# Altium PCB PCB.PcbDoc
Units mil, origin at the board's own origin, x right, y up, seen from the top; angles counter-clockwise.
Board outline 11290 x 5470 mil, 2 copper layers (Top Layer, Bottom Layer), stack 61.756 mil thick; 71 components, 74 nets, 190 pads, 9 vias.
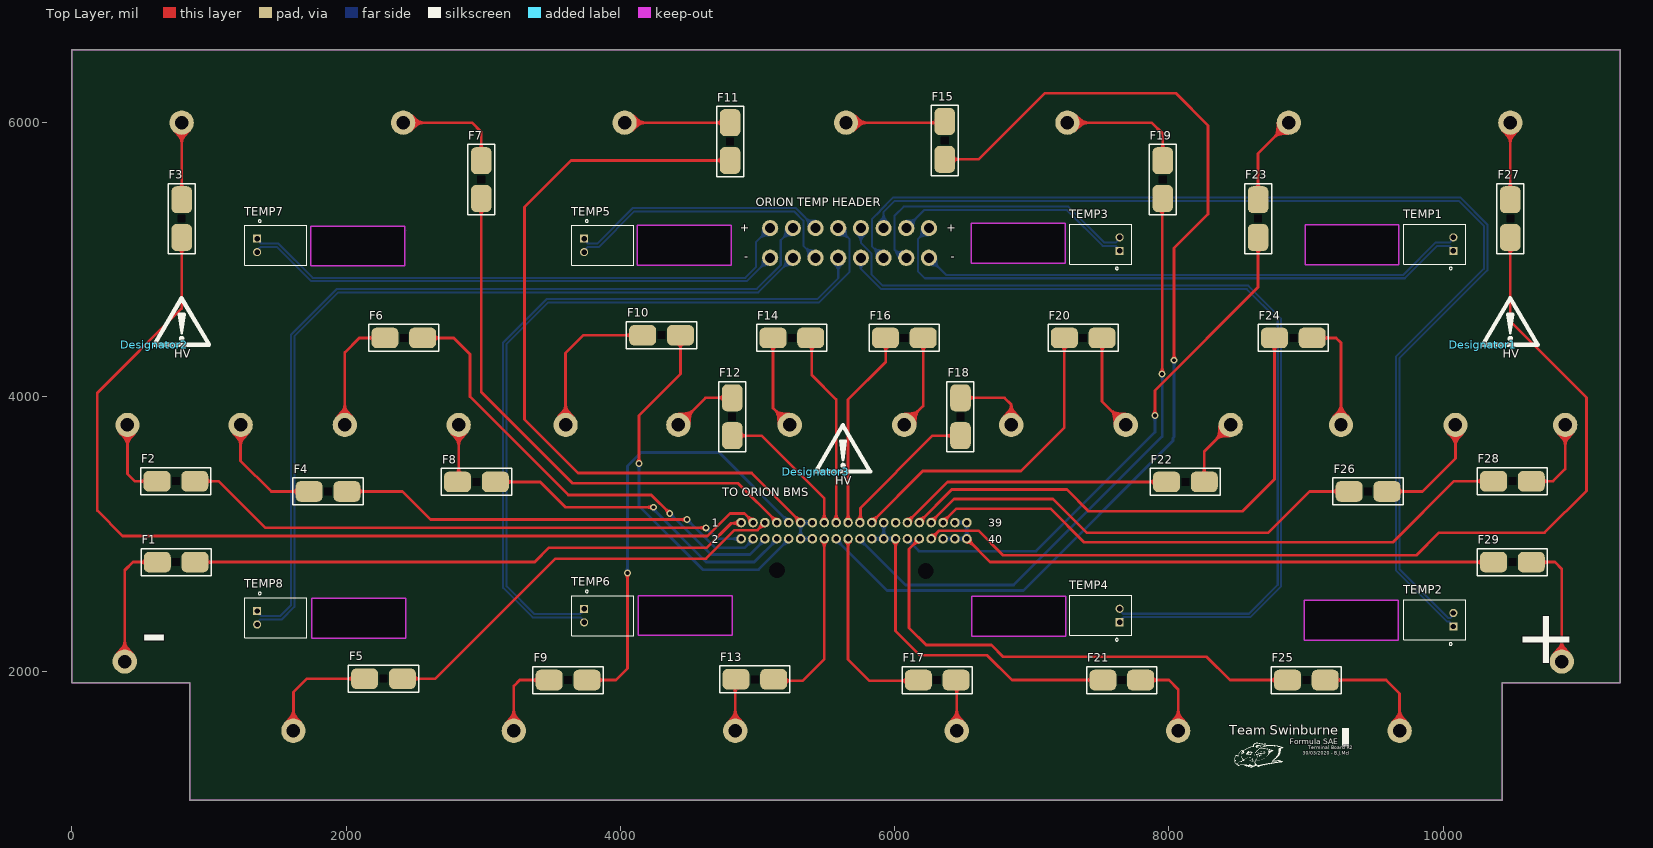
[diagram p0: Top Layer view]
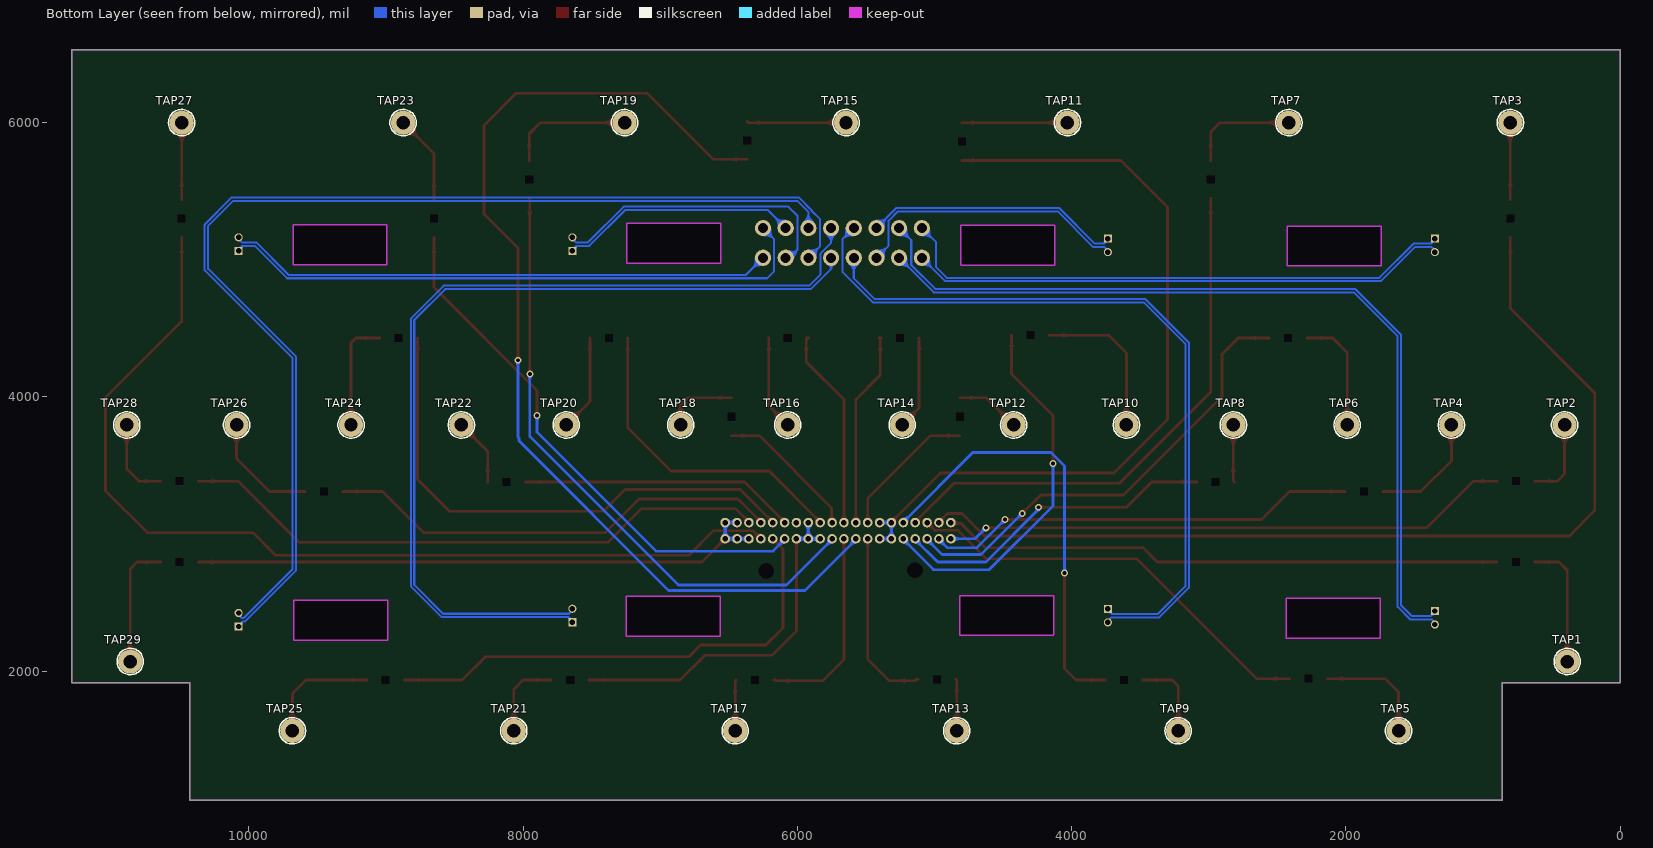
[diagram p1: Bottom Layer view, seen from below]
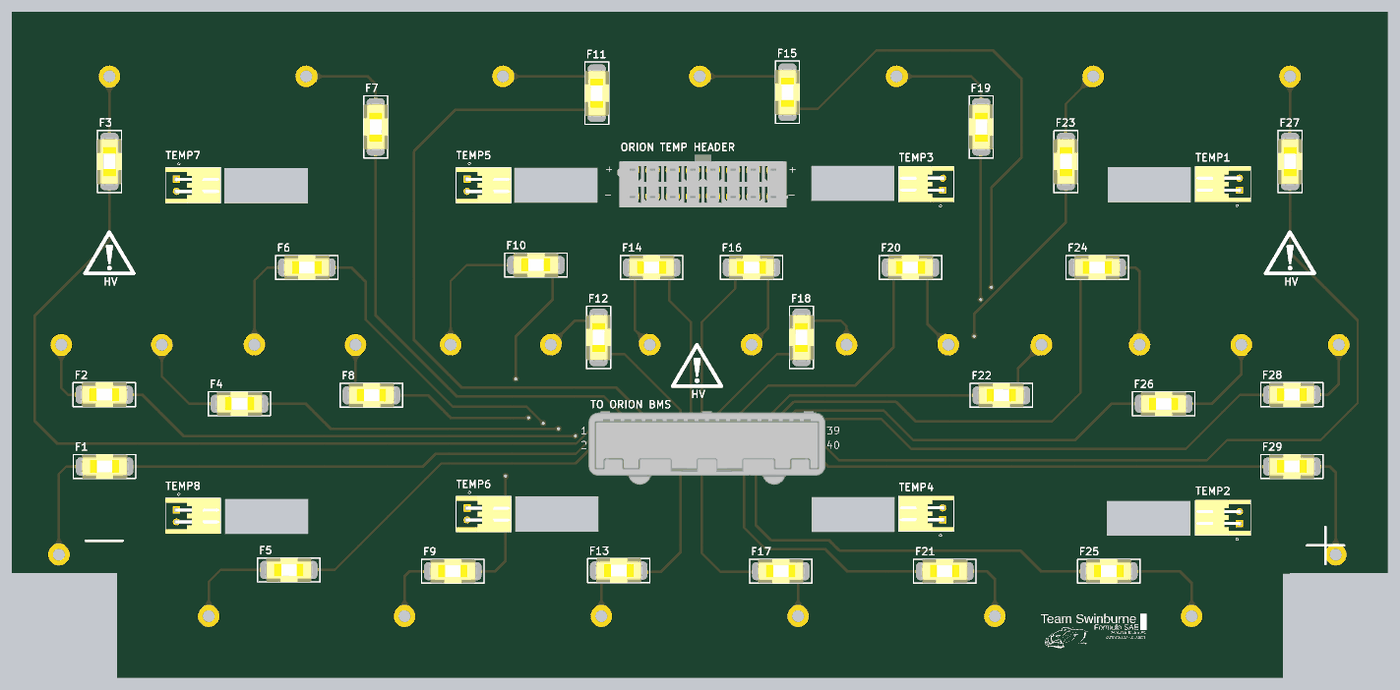
[diagram p2: 3D render of the assembled board from above, using the file's embedded part models]

## Layer stack, top to bottom
Top Solder: solder mask 1, SM-001, Dk 4
Top Layer: signal copper 1.378
Dielectric 1: core 59, Core-043, Dk 4.3
Bottom Layer: signal copper 1.378
Bottom Solder: solder mask 1, SM-001, Dk 4

## Board outline
0,1915 860,1915 860,1060 10430,1060 10430,1915 11290,1915 11290,6530 0,6530
cut-out: 8987.5,2515 9672.5,2515 9672.5,2225 8987.5,2225
cut-out: 6562.5,2545 7247.5,2545 7247.5,2255 6562.5,2255
cut-out: 8992.5,5255 9677.5,5255 9677.5,4965 8992.5,4965
cut-out: 6557.5,5265 7242.5,5265 7242.5,4975 6557.5,4975
cut-out: 1747.5,2530 2432.5,2530 2432.5,2240 1747.5,2240
cut-out: 4130,2550 4815,2550 4815,2260 4130,2260
cut-out: 4122.5,5250 4807.5,5250 4807.5,4960 4122.5,4960
cut-out: 2440,5215
cut-out: 1742.5,5245 2427.5,5245 2427.5,4955 1742.5,4955

## Design rules (kind name [scope] priority, off if disabled: settings)
Clearance [All] p1: gap=10 ignorepadtopadclearanceinfootprint=FALSE except(0: Arc-Hole Track-Hole SMDPad-Hole THPad-Hole Via-Hole Fill-Hole Poly-Hole Region-Hole Text-Hole)
PolygonConnect [All] p1: connectstyle=Relief reliefconductorwidth=10 reliefentries=4 polygonreliefangle="90 Angle" airgapwidth=10
RoutingVias [All] p1: holewidth=28 width=50 viastyle="Through Hole" minholewidth=28 minwidth=50 maxholewidth=28 maxwidth=50
SolderMaskExpansion [All] p1: expansion=4 istentingtop=FALSE
Width [All] p1: maxlimit=50 minlimit=10 preferedwidth=40
30 further rules are at their usual default settings.

## Components (designator, comment, footprint, x,y, rotation, side; value= is the part's Value field where it differs from the comment)
Designator1 "Comment" "~HV Silk" 10290,4379.92 r0 top
Designator2 "Comment" "~HV Silk" 600,4379.92 r0 top
Designator3 "Comment" "~HV Silk" 5423.23,3454.72 r0 top
F1 "0154.750DR" "Omni BLOK 0154" 760,2795 r180 top
F2 "0154.750DR" "Omni BLOK 0154" 757.8,3385 r180 top
F3 "0154.750DR" "Omni BLOK 0154" 800,5300 r90 top
F4 "0154.750DR" "Omni BLOK 0154" 1867.2,3310 r180 top
F5 "0154.750DR" "Omni BLOK 0154" 2272.2,1945 r180 top
F6 "0154.750DR" "Omni BLOK 0154" 2420,4430 r180 top
F7 "0154.750DR" "Omni BLOK 0154" 2985,5585 r90 top
F8 "0154.750DR" "Omni BLOK 0154" 2950,3380 r180 top
F9 "0154.750DR" "Omni BLOK 0154" 3618.2,1935 r180 top
F10 "0154.750DR" "Omni BLOK 0154" 4300,4450 r180 top
F11 "0154.750DR" "Omni BLOK 0154" 4800,5862.2 r90 top
F12 "0154.750DR" "Omni BLOK 0154" 4815,3855 r90 top
F13 "0154.750DR" "Omni BLOK 0154" 4980,1940 r180 top
F14 "0154.750DR" "Omni BLOK 0154" 5250,4430 r180 top
F15 "0154.750DR" "Omni BLOK 0154" 6365,5870 r90 top
F16 "0154.750DR" "Omni BLOK 0154" 6070,4430 r0 top
F17 "0154.750DR" "Omni BLOK 0154" 6310.2,1935 r0 top
F18 "0154.750DR" "Omni BLOK 0154" 6480,3855 r90 top
F19 "0154.750DR" "Omni BLOK 0154" 7955,5585 r90 top
F20 "0154.750DR" "Omni BLOK 0154" 7375,4430 r0 top
F21 "0154.750DR" "Omni BLOK 0154" 7656.2,1935 r0 top
F22 "0154.750DR" "Omni BLOK 0154" 8120,3380 r0 top
F23 "0154.750DR" "Omni BLOK 0154" 8650,5300 r90 top
F24 "0154.750DR" "Omni BLOK 0154" 8907.2,4430 r0 top
F25 "0154.750DR" "Omni BLOK 0154" 9002.2,1935 r0 top
F26 "0154.750DR" "Omni BLOK 0154" 9452.2,3310 r0 top
F27 "0154.750DR" "Omni BLOK 0154" 10490,5300 r90 top
F28 "0154.750DR" "Omni BLOK 0154" 10505,3385 r0 top
F29 "0154.750DR" "Omni BLOK 0154" 10505,2795 r0 top
"ORION TEMP HEADER" "39293166" 39293166 5675,5105 r0 top
TAP1 "0850-0-15-20-83-14-11-0" 0850-0-15-20-83-14-11-0 385,2070 r180 bottom
TAP2 "0850-0-15-20-83-14-11-0" 0850-0-15-20-83-14-11-0 405,3795 r180 bottom
TAP3 "0850-0-15-20-83-14-11-0" 0850-0-15-20-83-14-11-0 800,6000 r180 bottom
TAP4 "0850-0-15-20-83-14-11-0" 0850-0-15-20-83-14-11-0 1230,3795 r180 bottom
TAP5 "0850-0-15-20-83-14-11-0" 0850-0-15-20-83-14-11-0 1615,1565 r180 bottom
TAP6 "0850-0-15-20-83-14-11-0" 0850-0-15-20-83-14-11-0 1990,3795 r180 bottom
TAP7 "0850-0-15-20-83-14-11-0" 0850-0-15-20-83-14-11-0 2415,6000 r180 bottom
TAP8 "0850-0-15-20-83-14-11-0" 0850-0-15-20-83-14-11-0 2820,3795 r180 bottom
TAP9 "0850-0-15-20-83-14-11-0" 0850-0-15-20-83-14-11-0 3222.5,1565 r180 bottom
TAP10 "0850-0-15-20-83-14-11-0" 0850-0-15-20-83-14-11-0 3600,3795 r180 bottom
TAP11 "0850-0-15-20-83-14-11-0" 0850-0-15-20-83-14-11-0 4030,6000 r180 bottom
TAP12 "0850-0-15-20-83-14-11-0" 0850-0-15-20-83-14-11-0 4422.31,3795 r180 bottom
TAP13 "0850-0-15-20-83-14-11-0" 0850-0-15-20-83-14-11-0 4837.5,1565 r180 bottom
TAP14 "0850-0-15-20-83-14-11-0" 0850-0-15-20-83-14-11-0 5235,3795 r180 bottom
TAP15 "0850-0-15-20-83-14-11-0" 0850-0-15-20-83-14-11-0 5645,6000 r180 bottom
TAP16 "0850-0-15-20-83-14-11-0" 0850-0-15-20-83-14-11-0 6070,3795 r180 bottom
TAP17 "0850-0-15-20-83-14-11-0" 0850-0-15-20-83-14-11-0 6452.5,1565 r180 bottom
TAP18 "0850-0-15-20-83-14-11-0" 0850-0-15-20-83-14-11-0 6850,3795 r180 bottom
TAP19 "0850-0-15-20-83-14-11-0" 0850-0-15-20-83-14-11-0 7260,6000 r180 bottom
TAP20 "0850-0-15-20-83-14-11-0" 0850-0-15-20-83-14-11-0 7685,3795 r180 bottom
TAP21 "0850-0-15-20-83-14-11-0" 0850-0-15-20-83-14-11-0 8067.5,1565 r180 bottom
TAP22 "0850-0-15-20-83-14-11-0" 0850-0-15-20-83-14-11-0 8450,3795 r180 bottom
TAP23 "0850-0-15-20-83-14-11-0" 0850-0-15-20-83-14-11-0 8875,6000 r180 bottom
TAP24 "0850-0-15-20-83-14-11-0" 0850-0-15-20-83-14-11-0 9255,3795 r180 bottom
TAP25 "0850-0-15-20-83-14-11-0" 0850-0-15-20-83-14-11-0 9682.5,1565 r180 bottom
TAP26 "0850-0-15-20-83-14-11-0" 0850-0-15-20-83-14-11-0 10090,3795 r180 bottom
TAP27 "0850-0-15-20-83-14-11-0" 0850-0-15-20-83-14-11-0 10490,6000 r180 bottom
TAP28 "0850-0-15-20-83-14-11-0" 0850-0-15-20-83-14-11-0 10890,3795 r180 bottom
TAP29 "0850-0-15-20-83-14-11-0" 0850-0-15-20-83-14-11-0 10865,2070 r180 bottom
TEMP1 "S2B-XH-A(LF)(SN)" S2B-XH-A(LF)(SN) 10080,5114.21 r90 top
TEMP2 "S2B-XH-A(LF)(SN)" S2B-XH-A(LF)(SN) 10080,2374.78 r90 top
TEMP3 "S2B-XH-A(LF)(SN)" S2B-XH-A(LF)(SN) 7645,5114.21 r90 top
TEMP4 "S2B-XH-A(LF)(SN)" S2B-XH-A(LF)(SN) 7645,2405.79 r90 top
TEMP5 "S2B-XH-A(LF)(SN)" S2B-XH-A(LF)(SN) 3730,5105 r270 top
TEMP6 "S2B-XH-A(LF)(SN)" S2B-XH-A(LF)(SN) 3730,2404.21 r270 top
TEMP7 "S2B-XH-A(LF)(SN)" S2B-XH-A(LF)(SN) 1345,5105 r270 top
TEMP8 "S2B-XH-A(LF)(SN)" S2B-XH-A(LF)(SN) 1345,2389.21 r270 top
"TO ORION BMS" "1376113-6" 1376113-6 5746.61,2965 r0 top

## Footprints (in the part's own frame and the unit in brackets; to place one, negate y for a bottom-side part, rotate by r counter-clockwise, add the part's x,y. Pads: shape width x height; smd on the part's side, far side on the other; paste and mask are expansions set on the pad)
0850-0-15-20-83-14-11-0 [mm]
  round 4.5 hole 2.5 mask+0.102: 1(0,0)
  silkscreen extent -2.44,-2.44 2.44,2.44, body extent -1.94,-1.94 1.94,1.94, height 5.61
1376113-6 [mil]
  round 0 hole 114.49 unplated: 0(-605,-230) 0(480,-235)
  round 70 hole 40: 1(-866.14,118.11) 2(-866.14,0) 3(-779.53,118.11) 4(-779.53,0) 5(-692.91,118.11) 6(-692.91,0) 7(-606.3,118.11) 8(-606.3,0) 9(-519.69,118.11) 10(-519.69,0) 11(-433.07,118.11) 12(-433.07,0) 13(-346.46,118.11) 14(-346.46,0) 15(-259.84,118.11) 16(-259.84,0) 17(-173.23,118.11) 18(-173.23,0) 19(-86.61,118.11) 20(-86.61,0) 21(0,118.11) 22(0,0) 23(86.61,118.11) 24(86.61,0) 25(173.23,118.11) 26(173.23,0) 27(259.84,118.11) 28(259.84,0) 29(346.46,118.11) 30(346.46,0) 31(433.07,118.11) 32(433.07,0) 33(519.69,118.11) 34(519.69,0) 35(606.3,118.11) 36(606.3,0) 37(692.91,118.11) 38(692.91,0) 39(779.53,118.11) 40(779.53,0)
  body extent -1015,-321 930,281, height 940
39293166 [mm]
  round 3 hole 1.85: 1(14.6,-2.3) 2(14.6,3.2) 3(10.4,-2.3) 4(10.4,3.2) 5(6.2,-2.3) 6(6.2,3.2) 7(2,-2.3) 8(2,3.2) 9(-2.2,-2.3) 10(-2.2,3.2) 11(-6.4,-2.3) 12(-6.4,3.2) 13(-10.6,-2.3) 14(-10.6,3.2) 15(-14.8,-2.3) 16(-14.8,3.2)
  body extent -17.9,-4.6 17.7,6.4, height 12.8
"Omni BLOK 0154" [mm]
  rrect50% 5x3.81 smd: 1(3.5,0) 2(-3.5,0)
  rect 0x0 hole 1.4 square unplated: 3(0,0)
  silkscreen extent -6.5,-2.5 6.5,2.5, body extent -4.93,-2.52 4.9,2.51, height 3.81
S2B-XH-A(LF)(SN) [mm]
  rect 1.508x1.508 hole 1: 1(-1.25,0.127)
  round 1.508 hole 1: 2(1.25,0.127)
  silkscreen extent -4.75,-2.17 3.7,9.33, body extent -3.68,-2.19 3.72,9.31, height 6.15
"~HV Silk" [mil] "HV Symbol Silkscreen overlay"
  silkscreen extent 0,0 400,339

## Part data
F1 F2 F3 F4 F5 F6 F7 F8 F9 F10 F11 F12 F13 F14 F15 F16 F17 F18 F19 F20 F21 F22 F23 F24 F25 F26 F27 F28 F29: "FUSE BOARD MNT 750MA 125VAC/VDC", Digikey Part Number=F1221CT-ND, Manufacturer="LittelFuse Inc", Digikey Link=https://www.digikey.com/product-detail/en/littelfuse-inc/0154.750DR/F1221CT-ND/183370, Part Number=0154.750DR
"ORION TEMP HEADER": Digikey Part Number=WM3850-ND, Angle=0, Contact=Tin, Flange=No, Part Number=39293166, Pitch=4.2mm, Positions=16, Row Spacing=5.5mm
TAP1 TAP2 TAP3 TAP4 TAP5 TAP6 TAP7 TAP8 TAP9 TAP10 TAP11 TAP12 TAP13 TAP14 TAP15 TAP16 TAP17 TAP18 TAP19 TAP20 TAP21 TAP22 TAP23 TAP24 TAP25 TAP26 TAP27 TAP28 TAP29: Digikey Part Number=ED90436-ND, Angle=90, Contact=Gold, Digikey Link=https://www.digikey.com.au/products/en?keywords=0850-0-15-20-83-14-11-0, Flange=NA, Part Number=0850-0-15-20-83-14-11-0, Pitch=NA, Positions=1, Row Spacing=NA
"TO ORION BMS": Digikey Part Number=1376113-6-ND, Angle=180, Contact=Gold, Digikey Link=https://www.digikey.com.au/products/en?keywords=1376113-6, Flange=na, Part Number=1376113-6, Pitch=3, Positions=40, Row Spacing=2.2

## Via types
v1: diameter 50, hole 28, Top Layer to Bottom Layer, tented both sides, 9 vias

## Nets (pads, with @x,y where several pads share a name; then routed paths per layer and width w, separated by ;. In a path a pad name is that pad's centre, name@x,y a point inside that pad or via, vN(x,y) a via of type N, cw(c..) or ccw(c..) an arc to the next point about the centre after c; other vN are vias at no path point)
1: "TO ORION BMS.1" F1.2 | length 4106.7
  Top Layer w20: F1.2 3375,2795 3480,2900 4630,2900 4808.11,3078.11 4864.26,3078.11 4869.87,3072.5 4880.47,3083.11
2: "TO ORION BMS.2" F2.2 | length 4158.9
  Top Layer w20: F2.2 1070,3385 1410,3045 v1(4625,3045)
  Bottom Layer w20: v1(4625,3045) 4705,2965 4880.47,2965
3: "TO ORION BMS.3" F3.2 | length 7204.8
  Top Layer w20: F3.2 800,4645 185,4030 185,3170 370,2985 4635,2985 4800,3150 4905.51,3150 4967.09,3088.42 4967.09,3083.11
4: "TO ORION BMS.4" F4.2 | length 3161.9
  Top Layer w20: F4.2 2410,3310 2615,3105 v1(4485,3105)
  Bottom Layer w20: v1(4485,3105) 4690,2900 4907.4,2900 4967.09,2959.69 4967.09,2965
5: "TO ORION BMS.5" F5.2 | length 3115.1
  Top Layer w20: F5.2 2650,1945 3525,2820 4625,2820 4833.11,3028.11 4998.7,3028.11 5053.7,3083.11
6: "TO ORION BMS.6" F6.2 | length 3382.4
  Top Layer w20: F6.2 2784.57,4430 2903.54,4311.02 2903.54,4001.46 3620,3285 4225,3285 v1(4360,3150)
  Bottom Layer w20: v1(4360,3150) 4660,2850 4944.01,2850 5053.7,2959.69 5053.7,2965
7: "TO ORION BMS.7" F7.2 | length 3964.9
  Top Layer w20: F7.2 2985,4035 3650,3370 4858.73,3370 5140.31,3088.42 5140.31,3083.11
8: "TO ORION BMS.8" F8.2 | length 2383.4
  Top Layer w20: F8.2 3415,3380 3600,3195 v1(4240,3195)
  Bottom Layer w20: v1(4240,3195) 4232.5,3187.5 4625,2795 4975.62,2795 5140.31,2959.69 5140.31,2965
9: "TO ORION BMS.9" F9.2 | length 3237.8
  Top Layer w20: F9.2 3966.5,1935 4051.18,2019.68 v1(4051.18,2716.54)
  Bottom Layer w20: v1(4051.18,2716.54) 4051.18,3494.82 4151.36,3595 4720.35,3595 5226.93,3088.42 5226.93,3083.11
10: "TO ORION BMS.10" F10.2 | length 2751.3
  Top Layer w20: v1(4135,3515) 4135,3865 4437.8,4167.8 F10.2
  Bottom Layer w20: v1(4135,3515) 4135,3205 4600,2740 5007.24,2740 5226.93,2959.69 5226.93,2965
11: "TO ORION BMS.11" "TO ORION BMS.12" "TO ORION BMS.13" "TO ORION BMS.14" F11.2 | length 5810
  Top Layer w20: F11.2 3639.41,5724.41 3300,5385 3300,3835 3690,3445 4956.96,3445 5313.54,3088.42 5313.54,3083.11
  Bottom Layer w20: 5400.16,2965 5313.54,2965 5313.54,3083.11 5400.16,3083.11
12: "TO ORION BMS.15" F12.2 | length 1037
  Top Layer w20: F12.2 5027.8,3717.2 5486.77,3258.23 5486.77,3083.11
13: "TO ORION BMS.16" F13.2 | length 1315.6
  Top Layer w20: F13.2 5131.75,1940 5142.62,1929.13 5326.77,1929.13 5486.77,2089.13 5486.77,2965
14: "TO ORION BMS.17" F14.2 | length 1437.5
  Top Layer w20: F14.2 5401.75,4430 5395,4423.25 5395,4160 5573.39,3981.61 5573.39,3083.11
15: "TO ORION BMS.18" F15.2 | length 7690.7
  Top Layer w20: F15.2 6612.2,5732.2 7095,6215 8050,6215 8285,5980 8285,5332.24 8037.4,5084.65 v1(8037.4,4266.73)
  Bottom Layer w20: 5573.39,2965 5573.39,2959.69 5944.49,2588.58 6938.58,2588.58 8030,3680 8030,3700 8037.4,3707.4 v1(8037.4,4266.73)
16: "TO ORION BMS.19" F16.2 | length 1481.7
  Top Layer w20: 5660,3083.11 5660,3980 5935,4255 5935,4413.25 5925.23,4423.02 5918.25,4430 F16.2
17: "TO ORION BMS.20" F17.2 | length 1459.9
  Top Layer w20: 5660,2965 5660,2084.09 5814.96,1929.13 6152.59,1929.13 6158.45,1935 F17.2
18: "TO ORION BMS.21" F18.2 | length 1077.2
  Top Layer w20: 5746.61,3083.11 5763.11,3083.11 5750,3096.22 5750,3190 6277.2,3717.2 F18.2
19: "TO ORION BMS.22" F19.2 | length 4534.2
  Top Layer w20: v1(7950.79,4166.34) 7950.79,5441.42 7950,5442.2 F19.2
  Bottom Layer w20: 5746.61,2965 5746.61,2959.69 6078.35,2627.95 6867.95,2627.95 7950.79,3710.79 v1(7950.79,4166.34)
20: "TO ORION BMS.23" F20.2 | length 2347.4
  Top Layer w20: 5833.23,3083.11 5833.23,3088.42 6204.81,3460 6920,3460 7237.2,3777.2 F20.2
21: "TO ORION BMS.24" "TO ORION BMS.25" "TO ORION BMS.26" "TO ORION BMS.28" F21.2 | length 2623.3
  Top Layer w20: 6006.46,2965 6006.46,2293.54 6185,2115 6675,2115 6855,1935 F21.2
  Bottom Layer w20: 5833.23,2965 5919.84,2965 ; 5919.84,3083.11 5919.84,2965 ; 6006.46,2965 5919.84,2965
22: "TO ORION BMS.29" F22.2 | length 2015.2
  Top Layer w20: 6093.07,3083.11 6093.07,3088.42 6384.65,3380 F22.2
23: "TO ORION BMS.30" F23.2 | length 3935.5
  Top Layer w20: v1(7897.64,3865.16) 7897.64,4047.24 8650,4799.61 F23.2
  Bottom Layer w20: 6093.07,2965 6093.07,2959.69 6177.76,2875 7030,2875 7897.64,3742.64 v1(7897.64,3865.16)
24: "TO ORION BMS.31" F24.2 | length 3887
  Top Layer w20: 6179.69,3083.11 6179.69,3088.42 6416.27,3325 7255.63,3325 7415.63,3165 8535,3165 8769.41,3399.41 F24.2
25: "TO ORION BMS.32" F25.2 | length 3597.7
  Top Layer w20: 6179.69,2965 6105,2890.31 6105,2315 6230,2190 6705,2190 6790,2105 8275,2105 8445,1935 F25.2
26: "TO ORION BMS.33" F26.2 | length 3348.2
  Top Layer w20: 6266.3,3083.11 6266.3,3088.42 6432.88,3255 7155,3255 7400,3010 8725,3010 9025,3310 F26.2
27: "TO ORION BMS.34" F27.2 | length 7149.1
  Top Layer w20: 6266.3,2965 6325.35,3024.06 6610.94,3024.06 6790,2845 9805,2845 9970,3010 10740,3010 11045,3315 11045,3995 10490,4550 F27.2
28: "TO ORION BMS.35" F28.2 | length 4345.4
  Top Layer w20: 6352.91,3083.11 6352.91,3088.42 6449.49,3185 7135,3185 7380,2940 9635,2940 10080,3385 F28.2
29: "TO ORION BMS.36" "TO ORION BMS.37" "TO ORION BMS.38" "TO ORION BMS.39" "TO ORION BMS.40" F29.2 | length 4289.4
  Top Layer w20: 6526.14,2965 6696.14,2795 F29.2
  Bottom Layer w20: 6352.91,2965 6439.53,2965 6526.14,2965 6526.14,3083.11 6439.53,3083.11
NetF1_1: F1.1 TAP1.1 | length 927.3
  Top Layer w20: TAP1.1 385,2735.39 444.61,2795 F1.1
NetF2_1: F2.1 TAP2.1 | length 594.2
  Top Layer w20: TAP2.1 405,3437.52 457.52,3385 F2.1
NetF3_1: F3.1 TAP3.1 | length 562.2
  Top Layer w20: F3.1 TAP3.1
NetF4_1: F4.1 TAP4.1 | length 853.3
  Top Layer w20: TAP4.1 1230,3533.78 1453.78,3310 F4.1
NetF5_1: F5.1 TAP5.1 | length 842.2
  Top Layer w20: TAP5.1 1615,1847.28 1712.72,1945 F5.1
NetF6_1: F6.1 TAP6.1 | length 865.5
  Top Layer w20: TAP6.1 1990,4324.65 2095.35,4430 F6.1
NetF7_1: F7.1 TAP7.1 | length 807.6
  Top Layer w20: TAP7.1 2917.32,6000 2985,5932.32 F7.1
NetF8_1: F8.1 TAP8.1 | length 418.2
  Top Layer w20: F8.1 2820,3387.8 TAP8.1
NetF9_1: F9.1 TAP9.1 | length 602.6
  Top Layer w20: TAP9.1 3222.5,1891.79 3265.71,1935 F9.1
NetF10_1: F10.1 TAP10.1 | length 1140.2
  Top Layer w20: TAP10.1 3600,4318.5 3731.5,4450 F10.1
NetF11_1: F11.1 TAP11.1 | length 770
  Top Layer w20: TAP11.1 F11.1
NetF12_1: F12.1 TAP12.1 | length 474.6
  Top Layer w20: TAP12.1 4620.1,3992.8 F12.1
NetF13_1: F13.1 TAP13.1 | length 376.9
  Top Layer w20: TAP13.1 4837.5,1935.3 F13.1
NetF14_1: F14.1 TAP14.1 | length 685.9
  Top Layer w20: F14.1 5112.2,3917.8 TAP14.1
NetF15_1: F15.1 TAP15.1 | length 723.2
  Top Layer w20: TAP15.1 6357.2,6000 F15.1
NetF16_1: F16.1 TAP16.1 | length 692.1
  Top Layer w20: TAP16.1 6207.8,3932.8 F16.1
NetF17_1: F17.1 TAP17.1 | length 371.9
  Top Layer w20: F17.1 6452.5,1930.5 TAP17.1
NetF18_1: F18.1 TAP18.1 | length 539.8
  Top Layer w20: F18.1 6802.2,3992.8 6850,3945 TAP18.1
NetF19_1: F19.1 TAP19.1 | length 924.8
  Top Layer w20: TAP19.1 7874.02,6000 7955,5919.02 F19.1
NetF20_1: F20.1 TAP20.1 | length 706.3
  Top Layer w20: F20.1 7512.8,3967.2 TAP20.1
NetF21_1: F21.1 TAP21.1 | length 604
  Top Layer w20: F21.1 8000,1935 8067.5,1867.5 TAP21.1
NetF22_1: F22.1 TAP22.1 | length 494.6
  Top Layer w20: F22.1 8257.8,3602.8 TAP22.1
NetF23_1: F23.1 TAP23.1 | length 655.4
  Top Layer w20: F23.1 8650,5775 TAP23.1
NetF24_1: F24.1 TAP24.1 | length 824.3
  Top Layer w20: F24.1 9219.61,4430 9255,4394.61 TAP24.1
NetF25_1: F25.1 TAP25.1 | length 855.2
  Top Layer w20: F25.1 9584.69,1935 9682.5,1837.19 TAP25.1
NetF26_1: F26.1 TAP26.1 | length 844
  Top Layer w20: F26.1 9849.37,3310 10090,3550.63 TAP26.1
NetF27_1: F27.1 TAP27.1 | length 562.2
  Top Layer w20: F27.1 TAP27.1
NetF28_1: F28.1 TAP28.1 | length 605.8
  Top Layer w20: F28.1 10802.32,3385 10890,3472.68 TAP28.1
NetF29_1: F29.1 TAP29.1 | length 918.1
  Top Layer w20: F29.1 10815.24,2795 10865,2745.24 TAP29.1
TEMP+1: "ORION TEMP HEADER.2" TEMP1.1 | length 4391.5
  Bottom Layer w15: 6249.8,5230.98 6169.29,5150.47 6169.29,4916.34 6220.47,4865.16 9721.09,4865.16 9957.65,5101.71 10044.03,5101.71 10052.81,5092.93 10052.81,5087.19 TEMP1.1
TEMP+2: "ORION TEMP HEADER.6" TEMP2.1 | length 7974.5
  Bottom Layer w15: 5919.09,5230.98 5919.09,5349.21 5997.64,5427.76 10116.54,5427.76 10297.24,5247.05 10297.24,4933.07 9655.51,4291.34 9655.51,2734.33 10027.56,2362.28 10044.03,2362.28 10052.81,2353.5 10052.81,2347.76 TEMP2.1
TEMP+3: "ORION TEMP HEADER.4" TEMP3.1 | length 1736.9
  Bottom Layer w15: 6084.45,5230.98 6216.26,5362.8 7255.31,5362.8 7516.4,5101.71 7609.03,5101.71 7617.81,5092.93 7617.81,5087.19 TEMP3.1
TEMP+4: "ORION TEMP HEADER.8" TEMP4.1 | length 6735.5
  Bottom Layer w15: 5753.74,5230.98 5753.74,5122.71 5830.3,5046.16 5830.3,4982.74 5829.72,4982.17 5829.72,4893.62 5912.32,4811.02 8578.66,4811.02 8818.9,4570.79 8818.9,2618.11 8594.07,2393.29 7670.97,2393.29 7662.19,2384.5 7662.19,2378.76 TEMP4.1
TEMP+5: "ORION TEMP HEADER.12" TEMP5.1 | length 1875.8
  Bottom Layer w15: TEMP5.1 3757.19,5132.03 3757.19,5126.29 3765.97,5117.5 3831.08,5117.5 4091.54,5377.95 5276.46,5377.95 5423.23,5231.18 5423.03,5230.98
TEMP+6: "ORION TEMP HEADER.10" TEMP6.1 | length 5507.3
  Bottom Layer w15: TEMP6.1 3712.81,2431.24 3712.81,2425.5 3704.03,2416.71 3370.69,2416.71 3169.68,2617.72 3169.68,4386.3 3470.99,4687.6 5445,4687.6 5671.26,4913.86 5671.26,5148.11 5588.39,5230.98
TEMP+7: "ORION TEMP HEADER.16" TEMP7.1 | length 4120.3
  Bottom Layer w15: TEMP7.1 1372.19,5132.03 1372.19,5126.29 1380.97,5117.5 1506.42,5117.5 1755.41,4868.5 4911.02,4868.5 4988.19,4945.67 4988.19,5126.85 5092.32,5230.98
TEMP+8: "ORION TEMP HEADER.14" TEMP8.1 | length 6359.8
  Bottom Layer w15: TEMP8.1 1372.19,2416.24 1372.19,2410.5 1380.97,2401.71 1519.9,2401.71 1597.44,2479.25 1597.44,4451.77 1933.07,4787.4 4995.27,4787.4 5169.29,4961.42 5169.29,5142.6 5257.68,5230.98
TEMP-1: "ORION TEMP HEADER.1" TEMP1.2 | length 3996.9
  Bottom Layer w15: 6249.8,5014.45 6374.09,4890.16 9710.74,4890.16 9947.29,5126.71 10050.34,5126.71 10059.12,5135.5 ; 10059.12,5135.54 10075,5151.42 TEMP1.2
TEMP-2: "ORION TEMP HEADER.5" TEMP2.2 | length 8296.5
  Bottom Layer w15: 5919.09,5014.45 5833.66,5099.88 5833.66,5295.28 5894.09,5355.71 5894.09,5359.57 5987.28,5452.76 10126.89,5452.76 10322.24,5257.4 10322.24,4922.72 9680.51,4280.98 9680.51,2744.68 10037.91,2387.28 10050.34,2387.28 10059.12,2396.07 ; 10059.12,2396.11 10075,2411.99 TEMP2.2
TEMP-3: "ORION TEMP HEADER.3" TEMP3.2 | length 2157
  Bottom Layer w15: 6084.45,5014.45 6056.55,5014.45 6000,5071 6000,5322.83 6064.96,5387.8 7265.67,5387.8 7526.75,5126.71 7615.34,5126.71 7624.12,5135.5 ; 7624.12,5135.54 7640,5151.42 TEMP3.2
TEMP-4: "ORION TEMP HEADER.7" TEMP4.2 | length 6470.4
  Bottom Layer w15: 5753.74,5014.45 5753.74,4934.25 5901.97,4786.02 8568.31,4786.02 8793.9,4560.43 8793.9,2628.47 8583.72,2418.29 7664.66,2418.29 7655.88,2427.07 ; TEMP4.2 7640,2442.99 7655.88,2427.12
TEMP-5: "ORION TEMP HEADER.11" TEMP5.2 | length 2064.8
  Bottom Layer w15: TEMP5.2 3735,5067.79 3750.88,5083.67 ; 3750.88,5083.71 3759.66,5092.5 3841.44,5092.5 4101.89,5352.95 5266.1,5352.95 5333.93,5285.13 5333.93,5284.65 5334.65,5283.93 5334.65,5102.83 5423.03,5014.45
TEMP-6: "ORION TEMP HEADER.9" TEMP6.2 | length 5277.6
  Bottom Layer w15: 3719.12,2382.88 3735,2367.01 TEMP6.2 ; 3719.12,2382.93 3710.34,2391.71 3360.33,2391.71 3144.69,2607.36 3144.68,4396.65 3460.63,4712.6 5434.65,4712.6 5588.39,4866.34 5588.39,5014.45
TEMP-7: "ORION TEMP HEADER.15" TEMP7.2 | length 3938.5
  Bottom Layer w15: TEMP7.2 1350,5067.79 1365.88,5083.67 ; 1365.88,5083.71 1374.66,5092.5 1496.06,5092.5 1745.06,4843.5 4921.38,4843.5 5092.32,5014.45
TEMP-8: "ORION TEMP HEADER.13" TEMP8.2 | length 6178
  Bottom Layer w15: TEMP8.2 1350,2352.01 1365.88,2367.88 ; 1365.88,2367.93 1374.66,2376.71 1530.26,2376.71 1622.44,2468.9 1622.44,4441.42 1943.43,4762.4 5005.63,4762.4 5257.68,5014.45
pads on no net: "TO ORION BMS.0" "TO ORION BMS.27" F1.3 F2.3 F3.3 F4.3 F5.3 F6.3 F7.3 F8.3 F9.3 F10.3 F11.3 F12.3 F13.3 F14.3 F15.3 F16.3 F17.3 F18.3 F19.3 F20.3 F21.3 F22.3 F23.3 F24.3 F25.3 F26.3 F27.3 F28.3 F29.3

## Keep-outs
Keep-Out Layer:
  lines w10: 4130,2260 4815,2260 4815,2550 4130,2550 4130,2265 ; 0,1915 0,6530 11290,6530 11290,1915 10430,1915 10430,1060 860,1060 860,1915 0,1915 ; 1742.5,4955 1742.5,5245 2427.5,5245 2427.5,4955 1742.5,4955 ; 1747.5,2240 1747.5,2530 2432.5,2530 2432.5,2240 1747.5,2240 ; 4122.5,4960 4122.5,5250 4807.5,5250 4807.5,4960 4122.5,4960 ; 6557.5,4975 6557.5,5265 7242.5,5265 7242.5,4975 6557.5,4975 ; 6562.5,2255 7247.5,2255 7247.5,2545 6562.5,2545 6562.5,2255 ; 8987.5,2225 8987.5,2515 9672.5,2515 9672.5,2225 8987.5,2225 ; 8992.5,4965 8992.5,5255 9677.5,5255 9677.5,4965 8992.5,4965

## Silkscreen, mask and mechanical layers (free items; w line width, h text height)
Top Overlay:
  drawing of 20 lines, arcs and shapes, not listed
  text "+" at 4931.1,5196.85 h59.06 r90
  text "+" at 6437.01,5196.85 h59.06 r90
  text "-" at 4931.1,5039.37 h59.06 r180
  text "-" at 6437.01,5039.37 h59.06 r180
  text "1" at 4665.35,3051.18 h59.06
  text "39" at 6683.07,3051.18 h59.06
  text "2" at 4665.35,2933.07 h59.06
  text "40" at 6683.07,2933.07 h59.06
  text "-" at 500.04,2094.53 h400
  text "+" at 10521.65,2057.09 h400
  text "Team Swinburne" at 8441.37,1508.58 h120
  text "Formula SAE" at 8881.37,1453.58 h70
  text "Terminal Board R2" at 9015.86,1418.58 h40
  text "30/03/2020 - B.J.McI" at 8974.86,1379.65 h40
Drill Drawing:
  circle w10: c97.4,7833.33 r33.33
  lines w10: 64.07,7200 64.07,7216.67 80.74,7233.33 64.07,7250 64.07,7266.67 80.74,7266.67 97.4,7250 114.07,7266.67 130.74,7266.67 130.74,7250 114.07,7233.33 130.74,7216.67 130.74,7200 114.07,7200 97.4,7216.67 80.74,7200 64.07,7200 ; 64.07,7383.33 97.4,7350 130.74,7383.33 97.4,7416.67 64.07,7383.33 ; 64.07,7500 97.4,7516.67 130.74,7500 114.07,7533.33 130.74,7566.67 97.4,7550 64.07,7566.67 80.74,7533.33 64.07,7500 ; 64.07,7650 130.74,7650 130.74,7716.67 64.07,7716.67 64.07,7650 ; 64.07,7966.67 80.74,7966.67 80.74,7950 114.07,7950 114.07,7966.67 130.74,7966.67 130.74,8000 114.07,8000 114.07,8016.67 80.74,8016.67 80.74,8000 64.07,8000 64.07,7966.67 ; 64.07,8166.67 130.74,8166.67 97.4,8100 64.07,8166.67
  lines w15: 4.28,7155 13232.56,7155 ; 4.28,8205 13232.56,8205 ; 555.16,7005 555.16,8355 ; 1135,7005 1135,8355 ; 2274.67,7005 2274.67,8355 ; 2780.55,7005 2780.55,8355 ; 3514.35,7005 3514.35,8355 ; 5013.9,7005 5013.9,8355 ; 5603.75,7005 5603.75,8355 ; 6349.54,7005 6349.54,8355 ; 7159.32,7005 7159.32,8355 ; 8013.08,7005 8013.08,8355 ; 9346.69,7005 9346.69,8355 ; 10680.3,7005 10680.3,8355 ; 11829.96,7005 11829.96,8355 ; 4.28,7005 13232.56,7005 13232.56,8355 4.28,8355 4.28,7005
  text "Symbol" at 94.28,8250 h72
  text "Count" at 600.16,8250 h72
  text "Hole Size" at 1180,8250 h72
  text "Plated" at 2319.67,8250 h72
  text "Hole Type" at 2825.55,8250 h72
  text "Drill Layer Pair" at 3559.35,8250 h72
  text "Via/Pad" at 5058.9,8250 h72
  text "Pad Shape" at 5648.75,8250 h72
  text "Template" at 6394.54,8250 h72
  text "Description" at 7204.32,8250 h72
  text "Hole Tolerance (+)" at 8058.08,8250 h72
  text "Hole Tolerance (-)" at 9391.69,8250 h72
  text "Hole Length" at 10725.3,8250 h72
  text "Routed Path Length" at 11874.96,8250 h72
  text "2" at 600.16,8100 h60
  text "114.49mil (2.908mm)" at 1180,8100 h60
  text "NPTH" at 2319.67,8100 h60
  text "Round" at 2825.55,8100 h60
  text "Top Layer - Bottom Layer" at 3559.35,8100 h60
  text "Pad" at 5058.9,8100 h60
  text "Rounded" at 5648.75,8100 h60
  text "c0hn291" at 6394.54,8100 h60
  text "-" at 10725.3,8100 h60
  text "-" at 11874.96,8100 h60
  text "9" at 600.16,7950 h60
  text "28.00mil (0.711mm)" at 1180,7950 h60
  text "PTH" at 2319.67,7950 h60
  text "Round" at 2825.55,7950 h60
  text "Top Layer - Bottom Layer" at 3559.35,7950 h60
  text "Via" at 5058.9,7950 h60
  text "Rounded" at 5648.75,7950 h60
  text "v127h71" at 6394.54,7950 h60
  text "-" at 10725.3,7950 h60
  text "-" at 11874.96,7950 h60
  text "16" at 600.16,7800 h60
  text "39.37mil (1.000mm)" at 1180,7800 h60
  text "PTH" at 2319.67,7800 h60
  text "Round" at 2825.55,7800 h60
  text "Top Layer - Bottom Layer" at 3559.35,7800 h60
  text "Pad" at 5058.9,7800 h60
  text "(Mixed)" at 5648.75,7800 h60
  text "(Mixed)" at 6394.54,7800 h60
  text "-" at 10725.3,7800 h60
  text "-" at 11874.96,7800 h60
  text "16" at 600.16,7650 h60
  text "72.84mil (1.850mm)" at 1180,7650 h60
  text "PTH" at 2319.67,7650 h60
  text "Round" at 2825.55,7650 h60
  text "Top Layer - Bottom Layer" at 3559.35,7650 h60
  text "Pad" at 5058.9,7650 h60
  text "Rounded" at 5648.75,7650 h60
  text "c300h185" at 6394.54,7650 h60
  text "-" at 10725.3,7650 h60
  text "-" at 11874.96,7650 h60
  text "29" at 600.16,7500 h60
  text "55.12mil (1.400mm)" at 1180,7500 h60
  text "NPTH" at 2319.67,7500 h60
  text "Rectangle" at 2825.55,7500 h60
  text "Top Layer - Bottom Layer" at 3559.35,7500 h60
  text "Pad" at 5058.9,7500 h60
  text "Rectangle" at 5648.75,7500 h60
  text "s0hn140_500" at 6394.54,7500 h60
  text "196.85mil (5.000mm)" at 10725.3,7500 h60
  text "196.85mil (5.000mm)" at 11874.96,7500 h60
  text "29" at 600.16,7350 h60
  text "98.43mil (2.500mm)" at 1180,7350 h60
  text "PTH" at 2319.67,7350 h60
  text "Round" at 2825.55,7350 h60
  text "Top Layer - Bottom Layer" at 3559.35,7350 h60
  text "Pad" at 5058.9,7350 h60
  text "Rounded" at 5648.75,7350 h60
  text "c450h250m460" at 6394.54,7350 h60
  text "-" at 10725.3,7350 h60
  text "-" at 11874.96,7350 h60
  text "40" at 600.16,7200 h60
  text "40.00mil (1.016mm)" at 1180,7200 h60
  text "PTH" at 2319.67,7200 h60
  text "Round" at 2825.55,7200 h60
  text "Top Layer - Bottom Layer" at 3559.35,7200 h60
  text "Pad" at 5058.9,7200 h60
  text "Rounded" at 5648.75,7200 h60
  text "c178h102" at 6394.54,7200 h60
  text "-" at 10725.3,7200 h60
  text "-" at 11874.96,7200 h60
  text "141 Total" at 600.16,7050 h60
  text "Slot definitions :" at 94.28,6905.03 h60
  text "Routed Path Length" at 1126.97,6905.03 h60
  text "= Calculated from tool start centre position to tool end centre position." at 2229.64,6905.03 h60
  text "Hole Length" at 1126.97,6805.05 h60
  text "= Routed Path Length + Tool Size = Slot length as defined in the PCB layout" at 1819.77,6805.05 h60
  text "FABRICATION NOTES" at 11629.39,6397.45 h118.11
  text "1. QUANTITY: 5" at 11629.39,6196.8 h118.11
  text "2. SIZE:" at 11629.39,5996.16 h118.11
  text "3. LAYERS: 2" at 11629.39,5795.51 h118.11
  text "4. SIGNAL LAYERS: 1,2" at 11629.39,5634.22 h118.11
  text "a) WEIGHT: 1oz" at 11826.24,5394.22 h118.11
  text "5. SOLDER MASKS: Red" at 11629.39,5146.61 h118.11
  text "6. SILKSCREEN: White" at 11629.39,4945.96 h118.11
  text "7. SURFACE FINISH: HASL (With Lead)" at 11629.39,4745.32 h118.11
  text "8. FINISHED COPPER: 2oz Cu" at 11629.39,4544.67 h118.11
  text "9. TOTAL THICKNESS: 1.6mm" at 11629.39,4344.03 h118.11
  text "CHECK CUTOUT ARE ROUTED CORRECTED (DEFINED ON KEEPOUT LAYER)" at 11605.39,3662.32 h118.11

## Text inside footprints (layer, text, board x,y; h text height)
Designator1: Top Overlay "HV" at 10435,4284.92 h60
Designator2: Top Overlay "HV" at 745,4284.92 h60
Designator3: Top Overlay "HV" at 5568.23,3359.72 h60